# Altium PCB PCB1.PcbDoc
Units mil, origin at the board's own origin, x right, y up, seen from the top; angles counter-clockwise.
Board outline 3160.03 x 4931.03 mil, 2 copper layers (Top Layer, Bottom Layer); 73 components, 110 nets, 520 pads, 0 vias.
Unrouted connection lines stored in the file: 297.
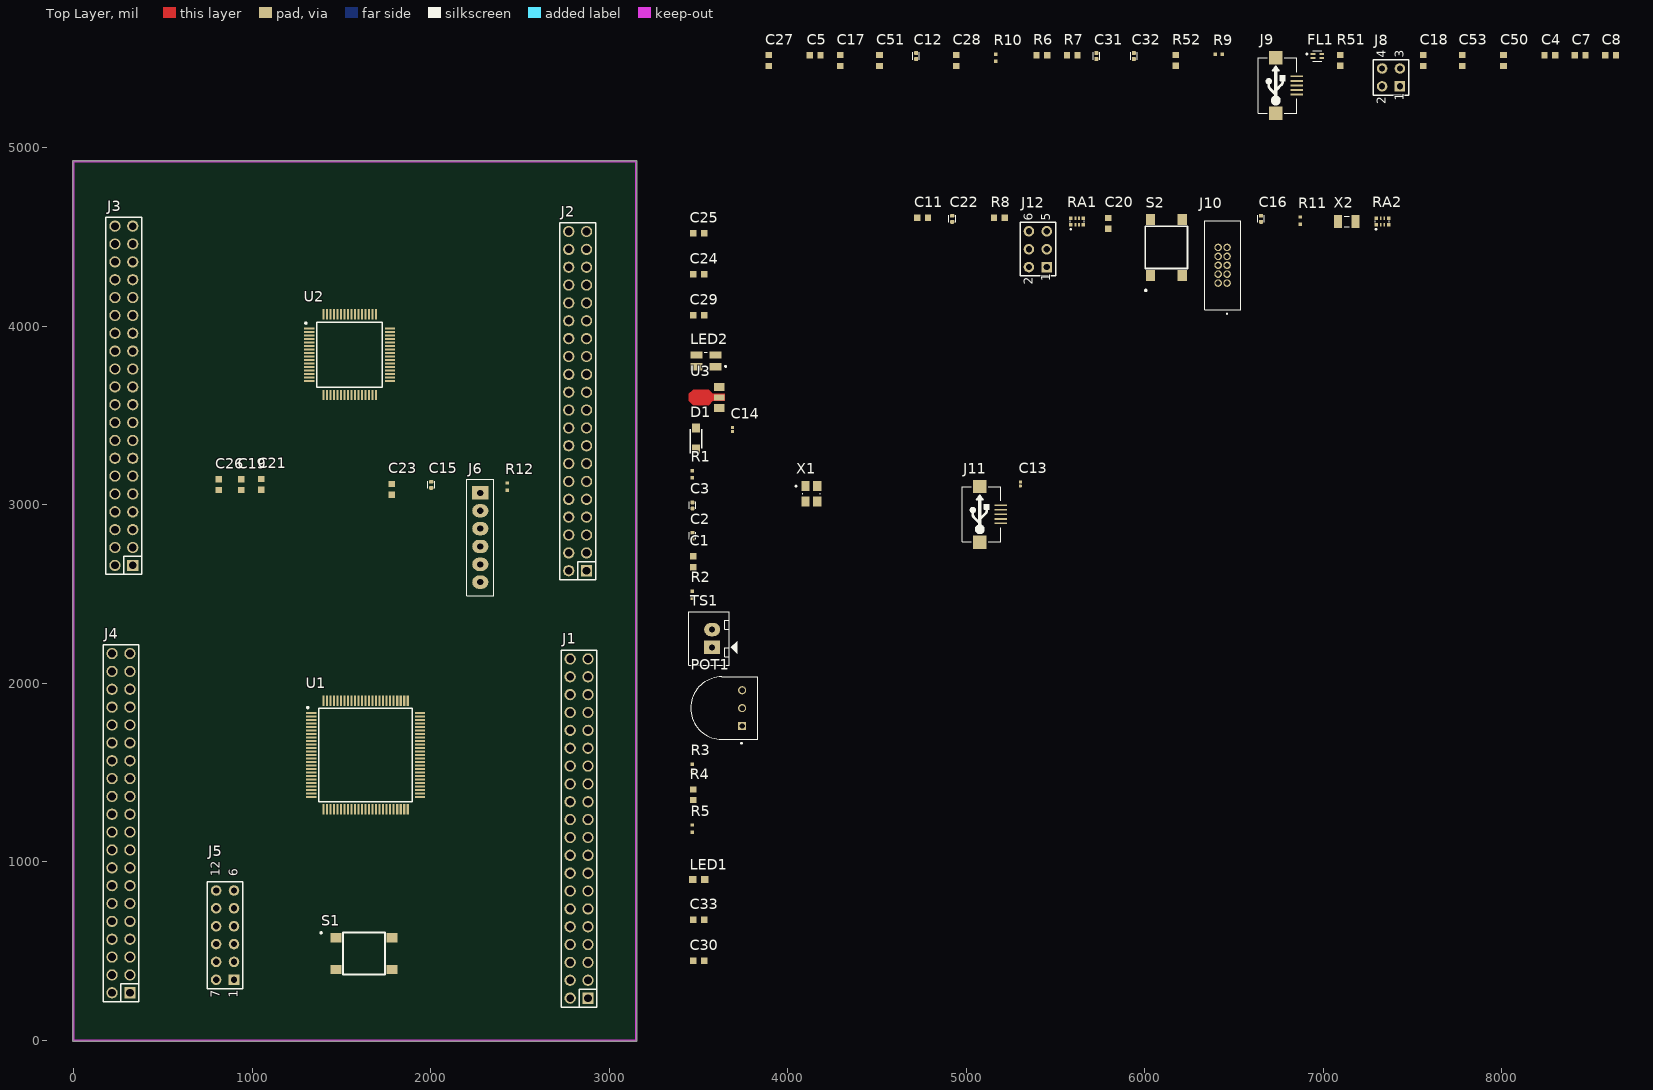
[diagram p0: Top Layer view]
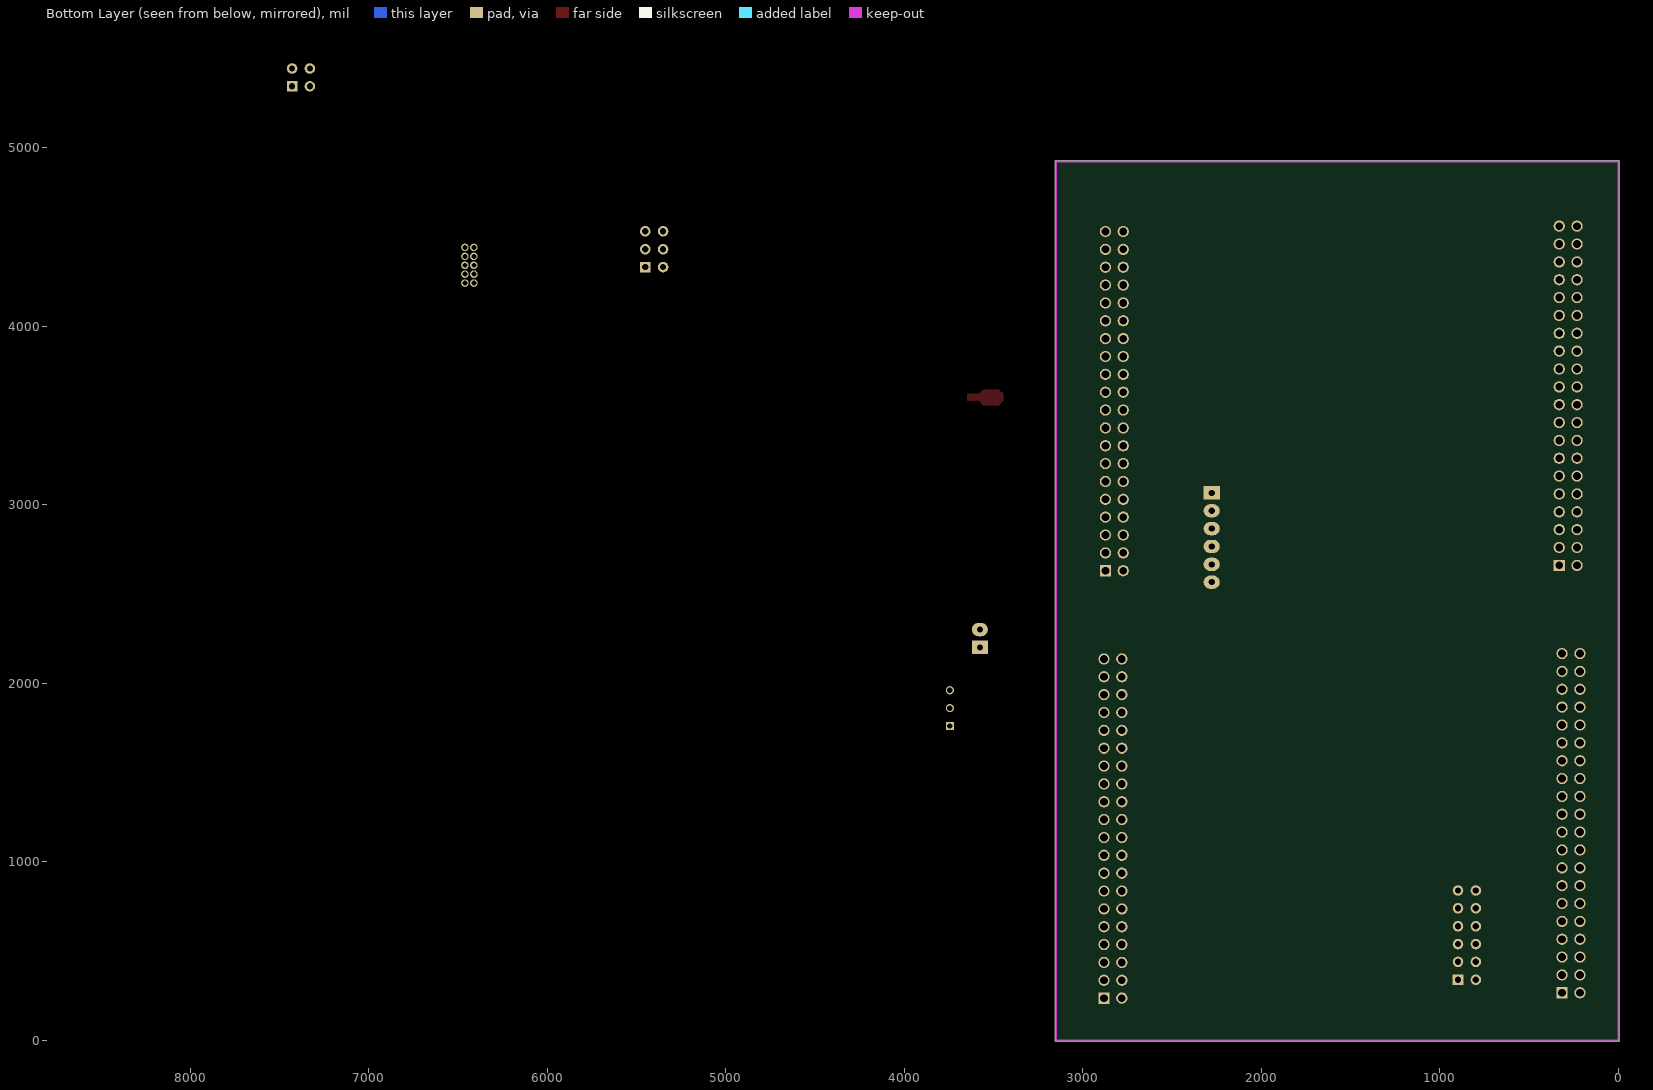
[diagram p1: Bottom Layer view, seen from below]

## Layer stack, top to bottom
Top Solder: solder mask 0.4, Solder Resist, Dk 3.5
Top Layer: signal copper 1.4
Dielectric 1: dielectric 12.6, FR-4, Dk 4.8
Bottom Layer: signal copper 1.4
Bottom Solder: solder mask 0.4, Solder Resist, Dk 3.5

## Board outline
-5.01,0 ccw(c0,0) 0,-5.01 3150,-5.01 ccw(c3150,0) 3155.02,0 3155.02,4921 ccw(c3150,4921) 3150,4926.02 0,4926.02 ccw(c0,4921) -5.01,4921

## Design rules (kind name [scope] priority, off if disabled: settings)
Clearance [All] p1: gap=10 ignorepadtopadclearanceinfootprint=FALSE except(0: Arc-Hole Track-Hole SMDPad-Hole THPad-Hole Via-Hole Fill-Hole Poly-Hole Region-Hole Text-Hole)
PolygonConnect [All] p1: connectstyle=Relief reliefconductorwidth=10 reliefentries=4 polygonreliefangle="90 Angle" airgapwidth=10
RoutingVias [All] p1: holewidth=28 width=50 viastyle="Through Hole" minholewidth=28 minwidth=50 maxholewidth=28 maxwidth=50
SolderMaskExpansion [All] p1: expansion=4 istentingtop=FALSE
Width [All] p1: maxlimit=10 minlimit=10 preferedwidth=10
30 further rules are at their usual default settings.

## Components (designator, comment, footprint, x,y, rotation, side; value= is the part's Value field where it differs from the comment)
C1 "0.1uF/50V/0603" CAPC1608X90N 3471,2680.5 r90 top
C2 "1UF/16V/0402" CAPC1005X55N 3466,2825.5 r90 top
C3 "1UF/16V/0402" CAPC1005X55N 3466,2995.5 r90 top
C4 "4.7uF/50V/0603" CAPC1608X90N 8268.5,5518 r0 top
C5 "0.1uF/50V/0603" CAPC1608X90N 4153.5,5518 r0 top
C7 "0.1uF/50V/0603" CAPC1608X90N 8438.5,5518 r0 top
C8 "0.1uF/50V/0603" CAPC1608X90N 8608.5,5518 r0 top
C11 "0.1uF/50V/0603" CAPC1608X90N 4755.5,4606 r0 top
C12 "0.01uF/50V/0402" CAPC1005X55N 4718.5,5513 r90 top
C13 "10pF/25V/0201" RESC0603X26N 5302.5,3116 r90 top
C14 "10pF/25V/0201" RESC0603X26N 3690,3421 r90 top
C15 "12pF/50V/0402" CAPC1005X55N 2002.5,3111 r90 top
C16 "12pF/50V/0402" CAPC1005X55N 6650.5,4601 r90 top
C17 "0.1uF/50V/0603" CAPC1608X90N 4293.5,5488 r90 top
C18 "0.1uF/50V/0603" CAPC1608X90N 7558.5,5488 r90 top
C19 "4.7uF/6.3V/0603" CAPC1608X90N 939,3113 r90 top
C20 "4.7uF/6.3V/0603" CAPC1608X90N 5795.5,4576 r90 top
C21 "0.1uF/50V/0603" CAPC1608X90N 1050,3114 r90 top
C22 "1uF/16V/0402" CAPC1005X55N 4920.5,4601 r90 top
C23 "0.1uF/50V/0603" CAPC1608X90N 1782.5,3086 r90 top
C24 "0.1uF/50V/0603" CAPC1608X90N 3501,4290.5 r180 top
C25 "0.1uF/50V/0603" CAPC1608X90N 3501,4520.5 r180 top
C26 "0.1uF/50V/0603" CAPC1608X90N 812,3112 r90 top
C27 "0.1uF/50V/0603" CAPC1608X90N 3893.5,5488 r90 top
C28 "4.7uF6.3V/0603" CAPC1608X90N 4943.5,5488 r90 top
C29 "0.1uF/50V/0603" CAPC1608X90N 3501,4060.5 r180 top
C30 "0.1UF/50V/0603" CAPC1608X90N 3501,445.5 r180 top
C31 "47pF/50V/402" CAPC1005X55N 5728.5,5513 r90 top
C32 "47pF/50V/402" CAPC1005X55N 5938.5,5513 r90 top
C33 "18pF/50V/0603" CAPC1608X90N 3501,675.5 r180 top
C50 "0.1uF/50V/0603" CAPC1608X90N 8008.5,5488 r90 top
C51 "0.1uF/50V/0603" CAPC1608X90N 4513.5,5488 r90 top
C53 "0.1uF/50V/0603" CAPC1608X90N 7778.5,5488 r90 top
D1 "40V/1A" SODFL3616X98N 3486,3370.5 r90 top
FL1 "DLP11SN201HL2L" FIL_DLP11SN201HL2L 6966.18,5513 r0 top
J1 "JP 2x20 2.54" "JP 2x20 DT" 2831,1186 r90 top
J2 "JP 2x20 2.54" "JP 2x20 DT" 2823,3580 r90 top
J3 "JP 2x20 2.54" "JP 2x20 DT" 281,3610 r90 top
J4 "JP 2x20 2.54" "JP 2x20 DT" 265,1216 r90 top
J5 "Header 6X2A" HDR2X6_CEN 898,339 r90 top
J6 "JP6" jam6 2277.5,3066 r90 top value="Connector 6"
J8 "JP2x2" HDR2X2 7428.5,5343 r90 top
J9 "USB Micro 5p SMD" "USB Micro 5p SMD" 6850.24,5348 r90 top
J10 "3220-10-0100-00" 322010010000 6460.5,4241 r90 top
J11 "USB Micro 5p SMD" "USB Micro 5p SMD" 5192.5,2946 r90 top
J12 "HEAD 3x2" HDR2X3 5450.5,4331 r90 top value="Connector 3x2"
LED1 "LED/0603" 0603 3501,900.5 r180 top
LED2 "LED/1210" LED_597-7701-507F 3541,3805.5 r180 top
POT1 "10K0" TRIM_3352T-1-103LF 3631,1860.5 r90 top
R1 "470R/0.5%/0402" RES_ERA2AED472X 3466,3170.5 r90 top
R2 "1.5K/0.5%/0402" RES_ERA2AED472X 3466,2495.5 r90 top
R3 "47K0/1%/0402" RES_ERA2AED472X 3466,1525.5 r90 top
R4 "560R0/1%/0603" RESC1508X55N 3471,1375.5 r90 top
R5 "470R/0.5%/0402" RES_ERA2AED472X 3466,1185.5 r90 top
R6 "10K/1%/0603" RESC1508X55N 5423.5,5518 r0 top
R7 "10K/1%/0603" RESC1508X55N 5593.5,5518 r0 top
R8 "10K2/1%/0603" RESC1508X55N 5185.5,4606 r0 top
R9 "1K50/0.5%/0402" RES_ERA2AED472X 6413.5,5523 r0 top
R10 "4.7K/0.5%/0402" RES_ERA2AED472X 5163.5,5503 r90 top
R11 "150R/1%/0402" RES_ERA2AED472X 6870.5,4591 r90 top
R12 "150R/1%/0402" RES_ERA2AED472X 2427.5,3101 r90 top
R51 "27R0/1%/0603" RESC1508X55N 7093.5,5488 r90 top
R52 "27R0/1%/0603" RESC1508X55N 6173.5,5488 r90 top
RA1 "30K0/0402" EXB28V510JX 5620.5,4586 r0 top
RA2 "30K0/0402" EXB28V510JX 7330.5,4586 r0 top
S1 "Switch" PTS645(SMT) 1626,486 r0 top
S2 "Switch" PTS645(SMT) 6120.5,4441 r90 top
TS1 "CON" CON2 3576,2200.5 r90 top
U1 "R7FA6M1AD3CFP#AA0" QFP50P1600X1600X170-100N 1635,1598 r0 top
U2 "R7FS124773A01CFM#AA1" QFP50P1200X1200X170-64N 1546,3840 r0 top
U3 "AP7215-33YG-13" SOT150P400X160-3N 3546,3600.5 r90 top
X1 "12MHZ" XTAL_ABM8G-12.000MHZ-B4Y-T 4132.5,3061 r0 top
X2 "32.768KHZ" XTAL_ABS07-32.768KHZ-T 7130.5,4586 r0 top

## Footprints (in the part's own frame and the unit in brackets; to place one, negate y for a bottom-side part, rotate by r counter-clockwise, add the part's x,y. Pads: shape width x height; smd on the part's side, far side on the other; paste and mask are expansions set on the pad)
0603 [mm]
  rect 1.1x1 smd: 1(-0.85,0) 2(0.85,0)
  body extent -0.8,-0.38 0.8,0.42, height 0.8
322010010000 [mm]
  round 1.07 hole 0.7: 1(0,0) 2(0,1.27) 3(1.27,0) 4(1.27,1.27) 5(2.54,0) 6(2.54,1.27) 7(3.81,0) 8(3.81,1.27) 9(5.08,0) 10(5.08,1.27)
  silkscreen extent -4.4,-1.91 8.86,3.18, body extent -3.78,-1.91 8.87,3.19, height 5.7
CAPC1005X55N [mm]
  rrect53% 0.54x0.6 smd: 1(-0.43,0) 2(0.43,0)
  silkscreen extent -0.5,-0.48 0.5,0.48, body extent -0.5,-0.25 0.5,0.25, height 0.55
CAPC1608X90N [mm]
  rect 0.89x0.93 smd: 1(-0.77,0) 2(0.762,0)
  body extent -0.8,-0.42 0.8,0.38, height 0.9
CON2 [mil]
  rect 75x90 hole 34: 1(0,0)
  oval 75x90 hole 34: 2(100,0)
  silkscreen extent -100,-140 200,130, body extent -95,-93 196,133, height 281
EXB28V510JX [mm]
  rect 0.525x0.5 smd: 1(-0.888,-0.45) 4(0.888,-0.45) 5(0.888,0.45) 8(-0.888,0.45)
  rect 0.25x0.5 smd: 2(-0.25,-0.45) 3(0.25,-0.45) 6(0.25,0.45) 7(-0.25,0.45)
  silkscreen extent -1,-1.2 1,0.1, body extent -1,-0.5 1,0.5, height 0.36
FIL_DLP11SN201HL2L [mm]
  rect 0.7x0.3 smd: 1(-0.625,0.275) 2(0.625,0.275) 3(0.625,-0.275) 4(-0.625,-0.275)
  silkscreen extent -1.6,-0.74 0.63,0.74, body extent -0.63,-0.5 0.62,0.5, height 0.92
HDR2X2 [mm] "Connector; Header; 2x2 Position"
  rect 1.5x1.5 hole 0.9: 1(0,0)
  round 1.5 hole 0.9: 2(0,2.54) 3(2.54,0) 4(2.54,2.54)
  silkscreen extent -1.27,-1.27 3.81,3.81, body extent -1.27,-1.26 3.81,3.82, height 8.77
HDR2X3 [mm] "Connector; Header; 3x2 Position"
  rect 1.5x1.5 hole 0.9: 1(0,0)
  round 1.5 hole 0.9: 2(0,2.54) 3(2.54,0) 4(2.54,2.54) 5(5.08,0) 6(5.08,2.54)
  silkscreen extent -1.27,-1.27 6.35,3.81, body extent -1.27,-1.27 6.35,3.81, height 8.77
HDR2X6_CEN [mm] "Connector; Header; 6x2 Position"
  rect 1.5x1.5 hole 0.9: 1(0,0)
  round 1.5 hole 0.9: 2(2.54,0) 3(5.08,0) 4(7.62,0) 5(10.16,0) 6(12.7,0) 7(0,2.54) 8(2.54,2.54) 9(5.08,2.54) 10(7.62,2.54) 11(10.16,2.54) 12(12.7,2.54)
  silkscreen extent -1.27,-1.27 13.97,3.81, body extent -1.27,-1.27 13.97,3.81, height 1.5
jam6 [mil]
  rect 75x90 hole 34: 1(0,0)
  oval 75x90 hole 34: 2(-100,0) 3(-200,0) 4(-300,0) 5(-400,0) 6(-500,0)
  silkscreen extent -575,-75 75,75, body extent -550,-51 50,49, height 704
"JP 2x20 DT" [mm] "40 pins, dual pin, straight, gold plating"
  rect 1.6x1.6 hole 1.1: 1(-24.13,-1.27)
  round 1.6 hole 1.1: 2(-21.59,-1.27) 3(-19.05,-1.27) 4(-16.51,-1.27) 5(-13.97,-1.27) 6(-11.43,-1.27) 7(-8.89,-1.27) 8(-6.35,-1.27) 9(-3.81,-1.27) 10(-1.27,-1.27) 11(1.27,-1.27) 12(3.81,-1.27) 13(6.35,-1.27) 14(8.89,-1.27) 15(11.43,-1.27) 16(13.97,-1.27) 17(16.51,-1.27) 18(19.05,-1.27) 19(21.59,-1.27) 20(24.13,-1.27) 21(24.13,1.27) 22(21.59,1.27) 23(19.05,1.27) 24(16.51,1.27) 25(13.97,1.27) 26(11.43,1.27) 27(8.89,1.27) 28(6.35,1.27) 29(3.81,1.27) 30(1.27,1.27) 31(-1.27,1.27) 32(-3.81,1.27) 33(-6.35,1.27) 34(-8.89,1.27) 35(-11.43,1.27) 36(-13.97,1.27) 37(-16.51,1.27) 38(-19.05,1.27) 39(-21.59,1.27) 40(-24.13,1.27)
  silkscreen extent -25.4,-2.54 25.4,2.54, body extent -25.4,-2.54 25.4,2.54, height 8.55
LED_597-7701-507F [mm]
  rect 1.7x1.05 smd: 1(-1.35,0.825) 2(1.35,0.825) 3(-1.35,-0.825) 4(1.35,-0.825)
  silkscreen extent -2.9,-1.25 0.2,1.25, body extent -1.6,-1.35 1.6,1.35, height 0.9
PTS645(SMT) [mm]
  rect 1.55x1.3 smd: 1(-3.975,2.25) 2(3.975,2.25) 3(-3.975,-2.25) 4(3.975,-2.25)
  silkscreen extent -6.23,-3 3,3.06, body extent -4.5,-3 4.5,3, height 4.3
QFP50P1200X1200X170-64N [mm]
  rect 1.475x0.3 smd: 1(-5.738,3.75) 2(-5.738,3.25) 3(-5.738,2.75) 4(-5.738,2.25) 5(-5.738,1.75) 6(-5.738,1.25) 7(-5.738,0.75) 8(-5.738,0.25) 9(-5.738,-0.25) 10(-5.738,-0.75) 11(-5.738,-1.25) 12(-5.738,-1.75) 13(-5.738,-2.25) 14(-5.738,-2.75) 15(-5.738,-3.25) 16(-5.738,-3.75) 33(5.738,-3.75) 34(5.738,-3.25) 35(5.738,-2.75) 36(5.738,-2.25) 37(5.738,-1.75) 38(5.738,-1.25) 39(5.738,-0.75) 40(5.738,-0.25) 41(5.738,0.25) 42(5.738,0.75) 43(5.738,1.25) 44(5.738,1.75) 45(5.738,2.25) 46(5.738,2.75) 47(5.738,3.25) 48(5.738,3.75)
  rect 0.3x1.475 smd: 17(-3.75,-5.738) 18(-3.25,-5.738) 19(-2.75,-5.738) 20(-2.25,-5.738) 21(-1.75,-5.738) 22(-1.25,-5.738) 23(-0.75,-5.738) 24(-0.25,-5.738) 25(0.25,-5.738) 26(0.75,-5.738) 27(1.25,-5.738) 28(1.75,-5.738) 29(2.25,-5.738) 30(2.75,-5.738) 31(3.25,-5.738) 32(3.75,-5.738) 49(3.75,5.738) 50(3.25,5.738) 51(2.75,5.738) 52(2.25,5.738) 53(1.75,5.738) 54(1.25,5.738) 55(0.75,5.738) 56(0.25,5.738) 57(-0.25,5.738) 58(-0.75,5.738) 59(-1.25,5.738) 60(-1.75,5.738) 61(-2.25,5.738) 62(-2.75,5.738) 63(-3.25,5.738) 64(-3.75,5.738)
  silkscreen extent -6.35,-4.65 4.65,4.65, body extent -6,-6 6,6, height 1.7
QFP50P1600X1600X170-100N [mm]
  rect 1.475x0.3 smd: 1(-7.738,6) 2(-7.738,5.5) 3(-7.738,5) 4(-7.738,4.5) 5(-7.738,4) 6(-7.738,3.5) 7(-7.738,3) 8(-7.738,2.5) 9(-7.738,2) 10(-7.738,1.5) 11(-7.738,1) 12(-7.738,0.5) 13(-7.738,0) 14(-7.738,-0.5) 15(-7.738,-1) 16(-7.738,-1.5) 17(-7.738,-2) 18(-7.738,-2.5) 19(-7.738,-3) 20(-7.738,-3.5) 21(-7.738,-4) 22(-7.738,-4.5) 23(-7.738,-5) 24(-7.738,-5.5) 25(-7.738,-6) 51(7.738,-6) 52(7.738,-5.5) 53(7.738,-5) 54(7.738,-4.5) 55(7.738,-4) 56(7.738,-3.5) 57(7.738,-3) 58(7.738,-2.5) 59(7.738,-2) 60(7.738,-1.5) 61(7.738,-1) 62(7.738,-0.5) 63(7.738,0) 64(7.738,0.5) 65(7.738,1) 66(7.738,1.5) 67(7.738,2) 68(7.738,2.5) 69(7.738,3) 70(7.738,3.5) 71(7.738,4) 72(7.738,4.5) 73(7.738,5) 74(7.738,5.5) 75(7.738,6)
  rect 0.3x1.475 smd: 26(-6,-7.738) 27(-5.5,-7.738) 28(-5,-7.738) 29(-4.5,-7.738) 30(-4,-7.738) 31(-3.5,-7.738) 32(-3,-7.738) 33(-2.5,-7.738) 34(-2,-7.738) 35(-1.5,-7.738) 36(-1,-7.738) 37(-0.5,-7.738) 38(0,-7.738) 39(0.5,-7.738) 40(1,-7.738) 41(1.5,-7.738) 42(2,-7.738) 43(2.5,-7.738) 44(3,-7.738) 45(3.5,-7.738) 46(4,-7.738) 47(4.5,-7.738) 48(5,-7.738) 49(5.5,-7.738) 50(6,-7.738) 76(6,7.738) 77(5.5,7.738) 78(5,7.738) 79(4.5,7.738) 80(4,7.738) 81(3.5,7.738) 82(3,7.738) 83(2.5,7.738) 84(2,7.738) 85(1.5,7.738) 86(1,7.738) 87(0.5,7.738) 88(0,7.738) 89(-0.5,7.738) 90(-1,7.738) 91(-1.5,7.738) 92(-2,7.738) 93(-2.5,7.738) 94(-3,7.738) 95(-3.5,7.738) 96(-4,7.738) 97(-4.5,7.738) 98(-5,7.738) 99(-5.5,7.738) 100(-6,7.738)
  silkscreen extent -8.35,-6.65 6.65,6.87, body extent -8,-8 8,8, height 1.7
RES_ERA2AED472X [mm]
  rect 0.475x0.5 smd: 1(-0.512,0) 2(0.512,0)
  body extent -0.5,-0.25 0.5,0.25, height 0.35
RESC0603X26N [mm]
  rrect25% 0.38x0.4 smd: 1(-0.28,0)
  rect 0.38x0.4 smd: 2(0.28,0)
  body extent -0.3,-0.15 0.3,0.15, height 0.32
RESC1508X55N [mm]
  rect 0.87x0.93 smd: 1(-0.755,0) 2(0.755,0)
  body extent -0.77,-0.4 0.78,0.4, height 0.55
SODFL3616X98N [mm]
  rect 1.24x1.12 smd: 1(-1.5,0) 2(1.5,0)
  silkscreen extent -2.12,-0.82 1.35,0.82, body extent -1.8,-0.82 1.8,0.83, height 0.98
SOT150P400X160-3N [mm]
  rrect3% 1.1x1.5 smd paste-2 mask+0: 1(-1.5,-1.8) 3(1.5,-1.8)
  rrect3% 0.8x1.5 smd paste-2 mask+0: 2(0,-1.8)
  Top Layer region: 1.1,1.95 1.1,-0.25 0.5,-0.85 0.5,-2.55 -0.5,-2.55 -0.5,-0.85 -1.1,-0.25 -1.1,1.95 -0.5,2.55 0.5,2.55
  body extent -2.25,-2.3 2.25,1.79, height 1.6
TRIM_3352T-1-103LF [mm]
  rect 1.16x1.16 hole 0.76: 1(-2.54,-2.87)
  round 1.16 hole 0.76: 2(0,-2.87) 3(2.54,-2.87)
  silkscreen extent -5.1,-5.08 4.44,4.44, body extent -4.44,-5.08 4.44,4.44, height 4.32
"USB Micro 5p SMD" [mil]
  rect 10x70 smd: 1(51.18,0) 2(25.59,0) 3(0,0) 4(-25.59,0) 5(-50,0)
  rect 74.8x74.8 smd: 5(-155.51,116.84) 5(155.51,116.84)
  silkscreen extent -155,-1 155,215, body extent -157,5 158,218, height 107
XTAL_ABM8G-12.000MHZ-B4Y-T [mm]
  rect 1.2x1.4 smd: 1(-0.85,1.1) 2(-0.85,-1.1) 3(0.85,-1.1) 4(0.85,1.1)
  silkscreen extent -2.3,-0.08 1.25,1.2, body extent -1.6,-1.24 1.6,1.24, height 0.99
XTAL_ABS07-32.768KHZ-T [mm]
  rect 1.1x1.9 smd: 1(-1.25,0) 2(1.25,0)
  silkscreen extent -0.38,-0.75 0.38,0.75, body extent -1.6,-0.75 1.6,0.75, height 0.89

## Part data
C1 C4 C5 C7 C8 C11 C17 C18 C19 C20 C21 C23 C24 C25 C26 C27 C28 C29 C30 C33 C50 C51 C53: library part CL10B104KB8NNNC, "0.1ÂµF Â±10% 50V Ceramic Capacitor X7R 0603 _1608 Metric_", Package="0603 Samsung", Availability=Unavailable, MF="Samsung Electro-Mechanics", MP=CL10B104KB8NNNC, Price=None, SnapEDA_Link=https://www.snapeda.com/parts/CL10B104KB8NNNC/Samsung%20Electro-Mechanics/view-part/3598309/?ref=snap
C2 C3 C12 C15 C16 C22 C31 C32: library part CL05A105KO5NNNC, "1ÂµF Â±10% 16V Ceramic Capacitor X5R 0402 (1005 Metric)", Package="0402 Samsung", Availability=Good, Check_prices=https://www.snapeda.com/parts/CL05A105KO5NNNC/Samsung%20Electro-Mechanics/view-part/3598151/?ref=eda, MF="Samsung Electro-Mechanics", MP=CL05A105KO5NNNC, Price=None, Purchase-URL=https://pricing.snapeda.com/search/part/CL05A105KO5NNNC/?ref=eda, SnapEDA_Link=https://www.snapeda.com/parts/CL05A105KO5NNNC/Samsung%20Electro-Mechanics/view-part/3598151/?ref=snap
C13 C14: library part RESC0603X26N, "TU0201", Package="0603 Samsung", Availability=Unavailable, MF="Samsung Electro-Mechanics", MP=CL10B104KB8NNNC, Price=None, SnapEDA_Link=https://www.snapeda.com/parts/CL10B104KB8NNNC/Samsung%20Electro-Mechanics/view-part/3598309/?ref=snap
D1: library part MBR140SFT1G, "Diode Schottky 40V 1A SOD-123FL ON Semiconductor MBR140SFT1G Schottky Diode, 1A, 40V, 2-Pin SOD-123FL", Manufacturer_Name=onsemi, Mouser Part Number=863-MBR140SFT1G, Arrow Part Number=MBR140SFT1G, Arrow Price/Stock=https://www.arrow.com/en/products/mbr140sft1g/on-semiconductor?region=nac, Datasheet Link=http://www.onsemi.com/pub/Collateral/MBR140SFT1-D.PDF, Geometry.Height=0.98mm, Manufacturer_Part_Number=MBR140SFT1G, Mouser Price/Stock=https://www.mouser.co.uk/ProductDetail/onsemi/MBR140SFT1G?qs=3JMERSakebrc0eIUjXPasA%3D%3D
FL1: "2 Line Common Mode Choke Surface Mount 200 Ohms @ 100MHz 110mA DCR 3.88Ohm", Package="1210 Murata", Availability=Unavailable, DigiKey-Purchase-URL=https://snapeda.com/shop?store=DigiKey&id=4300877, MF=Murata, MP=DLP11SN201HL2L, Price=None, SnapEDA_Link=https://www.snapeda.com/parts/DLP11SN201HL2L/Murata/view-part/4300877/?ref=snap
J1 J2 J3 J4: library part "JP 2x20 2.54 Duc Thang", "Cắm", Chung_Loai=Cắm, Don_Vi=Con, Ma_Hang=MH002686, Ten_Linh_Kien="Jump Đôi Đực 2.54MM 2x40P Thẳng 11MM"
J5: "Header, 6-Pin, Dual row", LatestRevisionDate=17-Jul-2002, LatestRevisionNote="Re-released for DXP Platform.", Publisher="Altium Limited"
J6: library part "jam 6", "jam 6"
J9 J11: "USB Type B", Ma_Hang=MH001020, Ten="MicroUSB MK5P SMD"
J10: "Conn Shrouded Header (4 Sides) HDR 10 POS 1.27mm Solder ST Thru-Hole", Manufacturer_Name="CNC Tech", Arrow Part Number=3220-10-0100-00, Arrow Price/Stock=https://www.arrow.com/en/products/3220-10-0100-00/cnc-tech-llc?region=nac, Datasheet Link=https://datasheet.datasheetarchive.com/originals/dk/DKDS-7/133059.pdf, Geometry.Height=5.6mm, Manufacturer_Part_Number=3220-10-0100-00
J12: library part JP3x2, "Connector 3x2"
LED1: library part LTST-C191KRKT, "http://octopart.com/ltst-c190krkt-lite-on-549893", Package=None, Availability=Unavailable, MP=LTST-C191KRKT, Price=None
LED2: library part 598-8610-207F, "Standard LEDs - SMD Red/Green WC 80/50mcd 645/570nm", Manufacturer_Name=Dialight, Mouser Part Number=645-598-8610-207F, Arrow Part Number=598-8610-207F, Arrow Price/Stock=https://www.arrow.com/en/products/598-8610-207f/dialight?region=nac, Datasheet Link=https://media.digikey.com/pdf/Data%20Sheets/Dialight%20PDFs/598%20Series%201210%20Pkg%20Bi-Color.pdf, Geometry.Height=0.8mm, Manufacturer_Part_Number=598-8610-207F, Mouser Price/Stock=https://www.mouser.co.uk/ProductDetail/Dialight/598-8610-207F?qs=7JStj%2FjQ2SFuCjosqwklHQ%3D%3D
POT1: library part 3352T-1-103LF, "10 kOhms 0.5W, 1/2W Through Hole Thumbwheel Potentiometer Top Adjustment", Package="3352T-3 Bourns", Availability="In Stock", Check_prices=https://www.snapeda.com/parts/3352T-1-103LF/Bourns/view-part/?ref=eda, MF=Bourns, MP=3352T-1-103LF, Price=None, Purchase-URL=https://pricing.snapeda.com/search/part/3352T-1-103LF/?ref=eda, SnapEDA_Link=https://www.snapeda.com/parts/3352T-1-103LF/Bourns/view-part/?ref=snap
R1 R2 R3 R5 R9 R10 R11 R12: library part ERA2AED472X, "Res Thin Film 0402 4.7K Ohm 0.5% 0.063W(1/16W) 25ppm/C Molded SMD Automotive Punched T/R", Package="1005-2 Panasonic", Availability="In Stock", Check_prices=https://www.snapeda.com/parts/ERA-2AED472X/Panasonic+Electronic+Components/view-part/?ref=eda, MF="Panasonic Electronic", MP=ERA-2AED472X, Price=None, Purchase-URL=https://pricing.snapeda.com/search/part/ERA-2AED472X/?ref=eda, SnapEDA_Link=https://www.snapeda.com/parts/ERA-2AED472X/Panasonic+Electronic+Components/view-part/?ref=snap
R4 R6 R7 R8 R51 R52: library part RMCF0603JT27R0, Package=None, Availability=Unavailable, MP=RMCF0603JT27R0, Price=None
RA1 RA2: library part EXB28V303JX, "Resistor Networks & Arrays Resistor ArrayChip 0804 4 elements", Manufacturer_Name=Panasonic, Datasheet Link=https://industrial.panasonic.com/cdbs/www-data/pdf/AOC0000/AOC0000C14.pdf, Geometry.Height=0mm, Manufacturer_Part_Number=EXB28V303JX
S1 S2: library part PTS645SM43SMTR92LFS, "C & K COMPONENTS - PTS645SM43SMTR92LFS - SWITCH, SPST, 0.05A, 12VDC, SMD, 4.3MM", Manufacturer_Name="C & K COMPONENTS", Mouser Part Number=611-PTS645SM43SMTR92, Arrow Part Number=PTS645SM43SMTR92LFS, Arrow Price/Stock=https://www.arrow.com/en/products/pts645sm43smtr92lfs/ck, Datasheet Link=http://www.farnell.com/datasheets/1914518.pdf, Manufacturer_Part_Number=PTS645SM43SMTR92LFS, Mouser Price/Stock=https://www.mouser.co.uk/ProductDetail/CK/PTS645SM43SMTR92LFS?qs=FESYatJ8odKPktxv6ncfWg%3D%3D
TS1: library part Con2, "connector 2"
U1: "ARM Cortex-M4 RA6M1 Microcontroller IC 32-Bit 120MHz 512KB (512K x 8) FLASH 100-LFQFP (14x14)", Manufacturer_Name="Renesas Electronics", Mouser Part Number=968-7FA6M1AD3CFP#AA0, Datasheet Link=https://www.renesas.com/in/en/document/dst/renesas-ra6m1-group-datasheet, Geometry.Height=1.7mm, Manufacturer_Part_Number=R7FA6M1AD3CFP#AA0, Mouser Price/Stock=https://www.mouser.co.uk/ProductDetail/Renesas-Electronics/R7FA6M1AD3CFPAA0?qs=d0WKAl%252BL4KaRUVVllxsS6w%3D%3D
U2: "S124", Manufacturer_Name="Renesas Electronics", Mouser Part Number=968-124773A01CFM#AA1, Datasheet Link=https://www.renesas.com/en-us/doc/products/renesas-synergy/doc/r01ds0264eu0130-synergy-s124.pdf, Geometry.Height=1.7mm, Manufacturer_Part_Number=R7FS124773A01CFM#AA1, Mouser Price/Stock=https://www.mouser.co.uk/ProductDetail/Renesas-Electronics/R7FS124773A01CFMAA1?qs=wUXugUrL1qwGPed2E2%2FoEA%3D%3D
U3: "Linear Voltage Regulator IC 1 Output 600mA SOT-89-3", Package="SOT-89-3 Diodes Inc.", Availability=Unavailable, MF="Diodes Inc.", MP=AP7215-33YG-13, Price=None, SnapEDA_Link=https://www.snapeda.com/parts/AP7215-33YG-13/Diodes%20Inc./view-part/269921/?ref=snap
X1: library part ABM8G-12.000MHZ-B4Y-T, "12 MHz Â±30ppm Crystal 10pF 120 Ohms 4-SMD, No Lead", Package="SMD-4 Abracon", Availability="In Stock", Check_prices=https://www.snapeda.com/parts/ABM8G-12.000MHZ-B4Y-T/Abracon+LLC/view-part/?ref=eda, MF=Abracon, MP=ABM8G-12.000MHZ-B4Y-T, Price=None, Purchase-URL=https://pricing.snapeda.com/search/part/ABM8G-12.000MHZ-B4Y-T/?ref=eda, SnapEDA_Link=https://www.snapeda.com/parts/ABM8G-12.000MHZ-B4Y-T/Abracon+LLC/view-part/?ref=snap
X2: library part ABS07-32.768KHZ-T, "32.768 kHz Â±20ppm Crystal 12.5pF 70 kOhms 2-SMD, No Lead", Package="SMD-2 Abracon LLC", Availability="In Stock", Check_prices=https://www.snapeda.com/parts/ABS07-32.768KHZ-T/Abracon+LLC/view-part/?ref=eda, MF=Abracon, MP=ABS07-32.768KHZ-T, Price=None, Purchase-URL=https://pricing.snapeda.com/search/part/ABS07-32.768KHZ-T/?ref=eda, SnapEDA_Link=https://www.snapeda.com/parts/ABS07-32.768KHZ-T/Abracon+LLC/view-part/?ref=snap

## Nets (pads, with @x,y where several pads share a name; then routed paths per layer and width w, separated by ;. In a path a pad name is that pad's centre, name@x,y a point inside that pad or via, vN(x,y) a via of type N, cw(c..) or ccw(c..) an arc to the next point about the centre after c; other vN are vias at no path point)
3V3: C3.1 C5.2 C19.2 C20.2 C24.2 C25.2 C27.2 C29.2 J2.15 J5.12 J6.6 J10.1 J12.1 POT1.1 R1.1 R10.2 U1.8 U2.20 U2.39 U3.3
3V3MCU: C4.2 C7.2 C8.2 C11.2 C18.2 C21.2 C23.2 C50.2 C53.2 J1.8 J1.38 J2.22 J2.25 J2.36 J4.14 J4.19 R3.2 R6.2 R7.2 R8.2 U1.15 U1.29 U1.46 U1.62 U1.82 U1.87 U1.88 U1.91 U2.56
+5V_JUSB: C26.2 D1.2 J11.1 RA2.5 RA2.6
AVSS0: C1.1 C2.2 C3.2 C4.1 C5.1 C7.1 C8.1 C11.1 C12.2 C13.1 C14.1 C15.2 C16.2 C17.1 C18.1 C19.1 C20.1 C21.1 C22.2 C23.1 C24.1 C25.1 C26.1 C27.1 C28.2 C29.1 C30.1 C31.2 C32.2 C33.1 C50.1 C51.1 C53.1 J1.9 J2.23 J2.24 J2.35 J4.23 J4.27 J5.5 J5.6 J5.11 J6.5 J9.4 J9.5 J10.3 J10.5 J10.9 J11.5 J12.5 LED1.1 LED2.2 LED2.4 POT1.3 R9.1 RA1.5 RA1.6 RA2.7 RA2.8 S1.2 S1.4 S2.2 S2.4 U1.12 U1.26 U1.45 U1.63 U1.83 U1.86 U1.89 U1.90 U2.8 U2.17 U2.40 U2.57 U3.1 X1.2 X1.4
JLED: R2.1 U2.45
JP108_SWDIO: J12.4 U2.33
JP305_SWCLK: J12.2 U2.32
JP407: RA2.2 RA2.3 RA2.4 U2.16
JRES: J12.3 R10.1 U2.25
JUSB_N: J11.2 U2.18
JUSB_P: J11.3 U2.19
JVCC_1: U2.11 U2.21
JVCL: C28.1 U2.5
NetC1_2: C1.2 C2.1 D1.1 U3.2
NetC31_1: C31.1 FL1.2 R51.1
NetC32_1: C32.1 FL1.3 R52.1
NetJ8_2: J8.2 R8.1
NetJ8_3: J8.3 R9.2
NetJ9_1: J9.1 RA1.7 RA1.8
NetJ9_2: J9.2 R51.2
NetJ9_3: J9.3 R52.2
NetLED1_2: LED1.2 R5.2
NetLED2_1: LED2.1 R1.2
NetLED2_3: LED2.3 R2.2
NetR11_1: R11.1 U2.48
NetR12_2: R12.2 U2.64
P000: J2.26 U1.100
P001: J2.27 U1.99
P002: J4.9 U1.98
P003: J2.28 U1.97
P004: C30.2 J2.29 POT1.2 U1.96
P005: J4.10 U1.95
P006: J4.11 U1.94
P007: J4.12 U1.93
P008: J4.13 U1.92
P014: J2.21 U1.85
P015: J1.20 U1.84
P100: J2.40 J5.3 U1.75
P101: J2.39 J5.2 U1.74
P102: J2.38 J5.4 U1.73
P103: J2.37 J5.1 U1.72
P104: J3.20 J6.3 U1.71
P105: J1.19 J6.2 U1.70
P106: J3.22 J6.4 U1.69
P107: J3.19 J6.1 U1.68
P108/TMS/SWDIO: J1.7 J10.2 R11.2 U1.51
P109/TDO: J1.4 J10.6 U1.52 U2.35
P110/TDI: J1.5 J10.8 U1.53
P111: J1.3 U1.54
P112: J3.8 R5.1 U1.55
P113: J3.33 U1.56
P114: J3.9 U1.57
P115: J3.32 U1.58
P200: J1.22 R7.1 U1.40
P201/MD: J1.23 J8.1 U1.39
P205: C12.1 J2.34 J4.36 U1.32
P206: J4.35 U1.31
P207: J1.37 R4.1 U1.30
P208: J4.33 U1.37
P209: J4.29 U1.36
P210: J4.30 U1.35
P211: J4.32 U1.34
P212/EXTAL: C14.2 J2.10 U1.14 X1.3
P213/XTAL: C13.2 J2.11 U1.13 X1.1
P214: J4.31 U1.33
P300/TCK/SWCLK: J1.16 J10.4 R12.1 U1.50
P301: J1.13 U1.49
P302: J1.6 U1.48
P303: J3.7 U1.47
P304: J3.35 J5.7 U1.44
P305: J3.6 U1.43
P306: J3.36 U1.42
P307: J3.5 U1.41
P400: J1.1 U1.1
P401: J1.2 U1.2
P402: J1.36 J5.9 U1.3
P403: J1.17 U1.4
P404: J1.34 J5.8 U1.5
P405: J1.33 J5.10 U1.6
P406: J1.32 U1.7
P407: C22.1 J2.30 RA1.1 RA1.2 RA1.3 U1.25
P408: J2.33 U1.24
P409: J2.32 U1.23
P410: J4.34 U1.22
P411: J2.31 U1.21
P412: J2.1 U1.20
P413: J2.2 U1.19
P414: J1.18 U1.18
P415: J2.3 R3.1 S1.1 S1.3 U1.17
P500: J4.1 U1.76
P501: J4.2 U1.77
P502: J4.3 U1.78
P503: J4.4 U1.79
P504: J4.5 U1.80
P508: J4.6 U1.81
P600: J1.12 U1.67
P601: J1.10 U1.66
P602: J1.11 U1.65
P608: J3.10 U1.59
P609: J1.15 U1.60
P610: J1.14 U1.61
P708: J2.4 U1.16
RES: J1.24 J10.10 R6.1 S2.1 S2.3 U1.38 U2.46
TS_CONN: C33.2 R4.2 TS1.2
USBMCU_N: FL1.1 J1.40 U1.27
USBMCU_P: FL1.4 J1.39 U1.28
VCL: C51.2 J3.26 U1.64
VCL0: C17.2 J2.14 U1.9
XCIN: C15.1 J2.13 U1.10 X2.1
XOUT: C16.1 U1.11 X2.2
pads on no net: J1.21 J1.25 J1.26 J1.27 J1.28 J1.29 J1.30 J1.31 J1.35 J2.5 J2.6 J2.7 J2.8 J2.9 J2.12 J2.16 J2.17 J2.18 J2.19 J2.20 J3.1 J3.2 J3.3 J3.4 J3.11 J3.12 J3.13 J3.14 J3.15 J3.16 J3.17 J3.18 J3.21 J3.23 J3.24 J3.25 J3.27 J3.28 J3.29 J3.30 J3.31 J3.34 J3.37 J3.38 J3.39 J3.40 J4.7 J4.8 J4.15 J4.16 J4.17 J4.18 J4.20 J4.21 J4.22 J4.24 J4.25 J4.26 J4.28 J4.37 J4.38 J4.39 J4.40 J8.4 J10.7 J11.4 J12.6 RA1.4 RA2.1 TS1.1 U2.1 U2.2 U2.3 U2.4 U2.6 U2.7 U2.9 U2.10 U2.12 U2.13 U2.14 U2.15 U2.22 U2.23 U2.24 U2.26 U2.27 U2.28 U2.29 U2.30 U2.31 U2.34 U2.36 U2.37 U2.38 U2.41 U2.42 U2.43 U2.44 U2.47 U2.49 U2.50 U2.51 U2.52 U2.53 U2.54 U2.55 U2.58 U2.59 U2.60 U2.61 U2.62 U2.63

## Keep-outs
Keep-Out Layer:
  lines w10: 0,0 0,4921 ; 0,0 3150,0 ; 0,0 0,4921 ; 0,0 3150,0 ; 0,4921 3150,4921 3150,0

## Text inside footprints (layer, text, board x,y; h text height)
J5: Top Overlay "7" at 818,239 h50 r90; Top Overlay "1" at 918,239 h50 r90; Top Overlay "6" at 918,919 h50 r90; Top Overlay "12" at 818,919 h50 r90
J8: Top Overlay "3" at 7448.5,5503 h50 r90; Top Overlay "4" at 7348.5,5503 h50 r90; Top Overlay "2" at 7348.5,5243 h50 r90; Top Overlay "1" at 7448.5,5263 h50 r90
J12: Top Overlay "6" at 5370.5,4591 h50 r90; Top Overlay "5" at 5470.5,4591 h50 r90; Top Overlay "2" at 5370.5,4231 h50 r90; Top Overlay "1" at 5470.5,4251 h50 r90